# Altium PCB SAMV71_Xplained_Ultra.PcbDoc (part 7 of 9)
Units mm, origin at the board's own origin, x right, y up, seen from the top; angles counter-clockwise.
Board outline 90 x 135 mm, 8 copper layers (Top Layer LF-Signals, Ground Plane 1 (GND), Power Plane (VCC), Ground Plane 2 (GND), Signal Layer 1, Signal Layer 2, Ground Plane 3 (GND), Bottom Layer LF-Signals), stack 1.632 mm thick; 483 components, 411 nets, 1994 pads, 1021 vias.
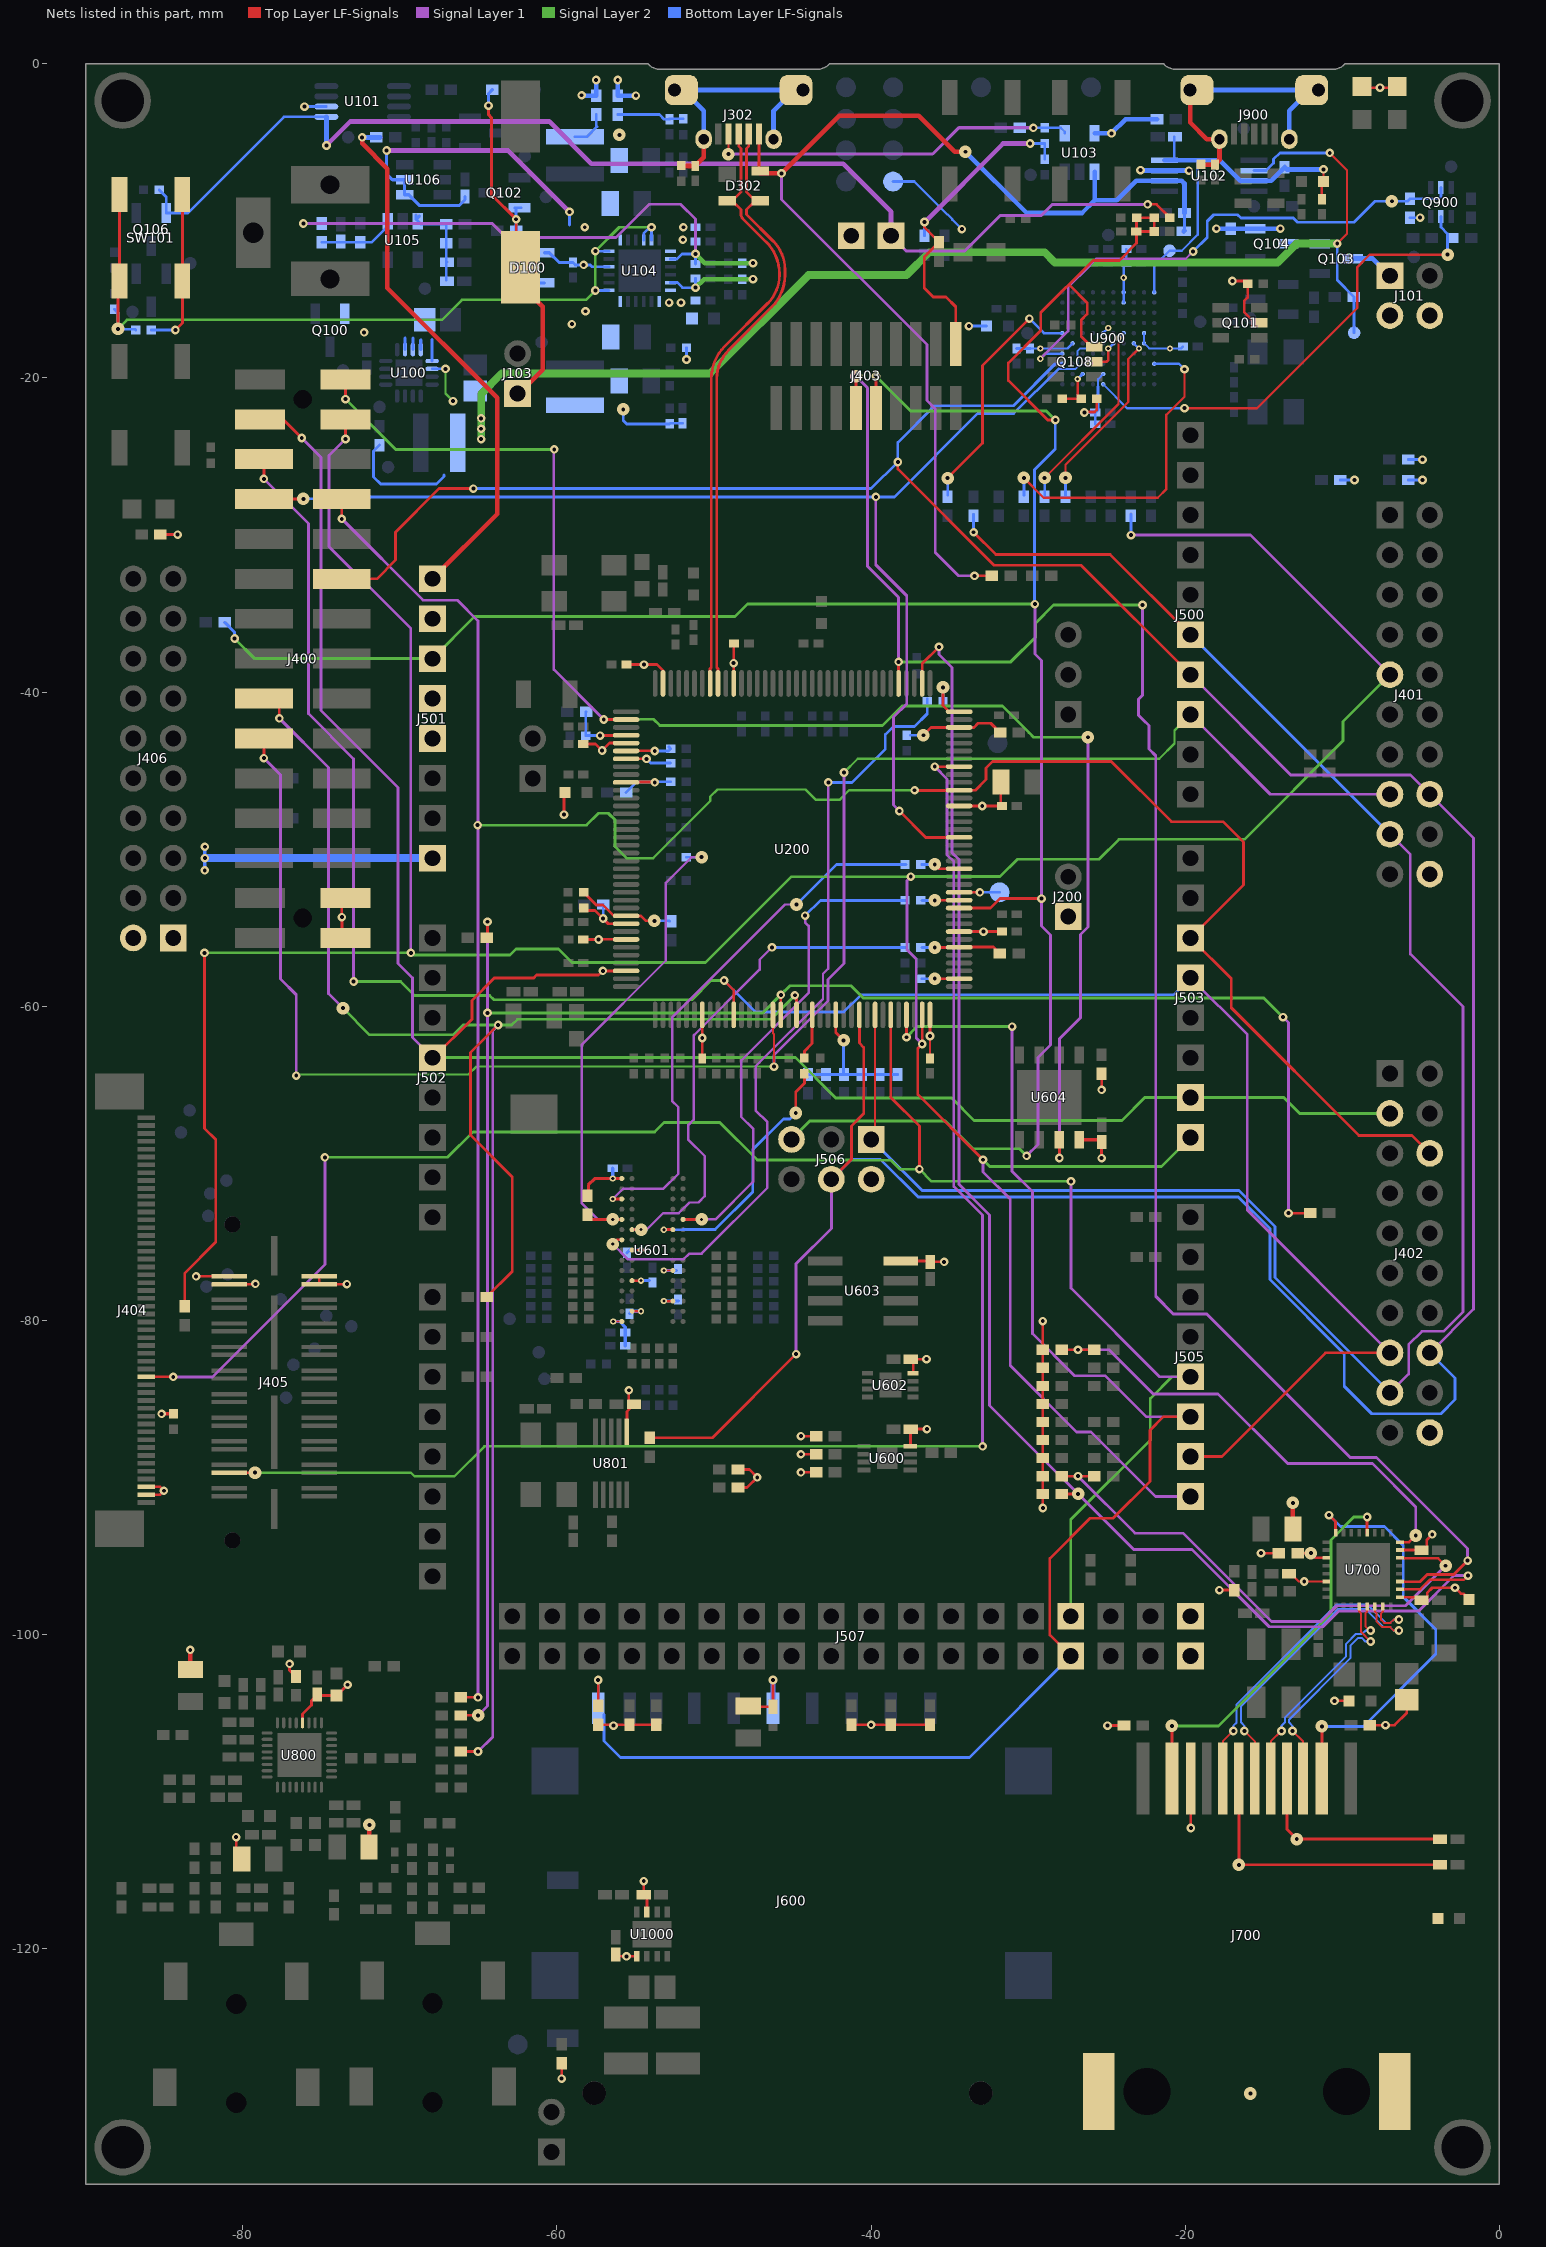
[diagram p12: the nets of this part, all layers, seen from the top]

## Via types
v1: diameter 0.55, hole 0.25, Top Layer LF-Signals to Bottom Layer LF-Signals, 546 vias
v2: diameter 0.55, hole 0.25, Top Layer LF-Signals to Bottom Layer LF-Signals, tented both sides, 190 vias
v3: diameter 0.55/0.55/0.55/0.8 (per signal layer), hole 0.25, Top Layer LF-Signals to Bottom Layer LF-Signals, tented top, 179 vias
v4: diameter 0.4, hole 0.2, Top Layer LF-Signals to Bottom Layer LF-Signals, 40 vias
v5: diameter 0.55, hole 0.25, Top Layer LF-Signals to Bottom Layer LF-Signals, tented top, 24 vias
v6: diameter 0.4, hole 0.2, Top Layer LF-Signals to Bottom Layer LF-Signals, tented both sides, 16 vias
v7: diameter 0.7, hole 0.35, Top Layer LF-Signals to Bottom Layer LF-Signals, 9 vias
v8: diameter 0.4/0.4/0.4/0.8 (per signal layer), hole 0.2, Top Layer LF-Signals to Bottom Layer LF-Signals, tented top, 6 vias
v9: diameter 0.4, hole 0.2, Top Layer LF-Signals to Bottom Layer LF-Signals, tented top, 5 vias
v10: diameter 0.66, hole 0.33, Top Layer LF-Signals to Bottom Layer LF-Signals, tented top, 4 vias
v11: diameter 0.55/0.55/0.55/0.8 (per signal layer), hole 0.25, Top Layer LF-Signals to Bottom Layer LF-Signals, 2 vias

## Nets (pads, with @x,y where several pads share a name; then routed paths per layer and width w, separated by ;. In a path a pad name is that pad's centre, name@x,y a point inside that pad or via, vN(x,y) a via of type N, cw(c..) or ccw(c..) an arc to the next point about the centre after c; other vN are vias at no path point) (continued)
PD08: J403.12 U200.113 U700.11 | length 117
  Top Layer LF-Signals w0.185: J403.12@-40.96,-21.91 v3(-40.96,-19.893) ; U200.113@-38.25,-39.45 v1(-38.25,-38.075) ; U700.11@-6.325,-96.625 -6.325,-96.642 -5.067,-96.642 -5.065,-96.64 -5.062,-96.64 -4.615,-96.193 -2.917,-96.193 v1(-2.025,-95.3)
  Signal Layer 1 w0.185: v3(-40.96,-19.893) -40.224,-20.63 -40.224,-31.994 -38.25,-33.968 v1(-38.25,-38.075) ; v1(-22.725,-34.461) -22.725,-40.208 -22.967,-40.45 -22.967,-41.061 -22.968,-41.489 -22.664,-41.793 -22.658,-41.793 -22.316,-42.135 -22.316,-43.619 -21.88,-44.055 -21.88,-78.47 -20.744,-79.606 -18.619,-79.606 -9.494,-88.731 -7.819,-88.731 -2.025,-94.525 v1(-2.025,-95.3)
  Signal Layer 2 w0.185: v1(-38.25,-38.075) -31.105,-38.075 -29.525,-36.495 -29.525,-35.594 -28.392,-34.461 v1(-22.725,-34.461)
PD09: R700.1 U200.110 U700.10 | length 95.8
  Top Layer LF-Signals w0.15: U700.10@-6.325,-97.125 -5.05,-97.125 -4.45,-96.525 -2.275,-96.525 v1(-2,-96.25)
  Top Layer LF-Signals w0.18: U200.110@-36.75,-39.45 -36.75,-38.2 v1(-35.675,-37.125) ; R700.1@-27.869,-91.048 v3(-26.825,-91.048)
  Signal Layer 1 w0.18: v1(-35.675,-37.125) -35.675,-37.604 -34.843,-38.436 -34.843,-50.228 -34.407,-50.663 -34.407,-71.338 -32.457,-73.288 -32.457,-85.415 -23.283,-94.59 -19.572,-94.59 -14.652,-99.51 -11.227,-99.51 -10.217,-98.5 -5.133,-98.5 -2.883,-96.25 v1(-2,-96.25)
PD10: J405.6 U200.101 | length 94.9
  Top Layer LF-Signals w0.175: J405.6@-80.87,-89.7 v3(-79.225,-89.7) ; v1(-35.95,-44.75) U200.101@-34.4,-44.75
  Signal Layer 1 w0.175: v1(-35.95,-44.75) -35.17,-45.53 -35.17,-50.363 -34.735,-50.798 -34.735,-71.473 -32.913,-73.296 -32.913,-88.012 v1(-32.9,-88.025)
  Signal Layer 2 w0.15: v3(-79.225,-89.7) -69.3,-89.7 -69.075,-89.925 -66.525,-89.925 -64.625,-88.025 v1(-32.9,-88.025)
PD11: J400.23 J402.6@-4.43,-69.37 J503.6@-19.67,-55.654 R200.1 U200.98 | length 168.9
  Top Layer LF-Signals w0.15: R200.1@-66.125,-104 v1(-65.025,-104)
  Top Layer LF-Signals w0.175: v1@-73.708,-28.967 J400.23@-73.708,-27.714 ; U200.98@-34.4,-46.25 -33.364,-46.25 -32.688,-45.573 -32.688,-44.838 -32.277,-44.427 -24.712,-44.427 -20.89,-48.25 -17.6,-48.25 -16.3,-49.55 -16.3,-52.284 J503.6@-19.67,-55.654 -17.075,-58.249 -17.075,-60.1 -8.95,-68.225 -5.575,-68.225 J402.6@-4.43,-69.37
  Top Layer LF-Signals w0.18: v1(-37.227,-46.252) -37.212,-46.267 -34.417,-46.267 U200.98@-34.4,-46.25
  Signal Layer 1 w0.18: v1(-73.705,-28.97) -68.525,-34.15 -66.35,-34.15 -65.035,-35.465 -65.035,-103.99 v1(-65.025,-104)
  Signal Layer 2 w0.15: -55.576,-50.57 -53.875,-50.57 -50.237,-46.932 -50.237,-46.654 -49.785,-46.202 -44.171,-46.202 -43.508,-46.865 -42.019,-46.865 -41.407,-46.252 v1(-37.227,-46.252) v1@-37.277,-46.202
  Signal Layer 2 w0.18: v1(-65.05,-48.475) -58.12,-48.475 -57.361,-47.716 -56.734,-47.716 -56.317,-48.133 -56.317,-49.829 -55.576,-50.57
PD12: J400.24 U200.92 U900.G5 | length 83.3
  Top Layer LF-Signals w0.175: J400.24@-78.661,-27.714 -76.164,-27.714 v3(-76.15,-27.7)
  Top Layer LF-Signals w0.18: v1(-38.2,-47.575) -36.525,-49.25 U200.92@-34.4,-49.25
  Signal Layer 1 w0.18: v1(-39.702,-27.576) -39.702,-31.898 -37.735,-33.865 -37.735,-40.757 -38.575,-41.597 -38.575,-47.2 v1(-38.2,-47.575)
  Bottom Layer LF-Signals w0.125: -27.972,-19.425 -26.975,-19.425 -26.85,-19.3 -26.85,-18.275 -26.7,-18.125 -26.2,-18.125 U900.G5@-25.875,-17.8
  Bottom Layer LF-Signals w0.15: -28.075,-19.425 -27.972,-19.425
  Bottom Layer LF-Signals w0.175: v3(-76.15,-27.7) -72.69,-27.7 -72.575,-27.585
  Bottom Layer LF-Signals w0.18: -72.575,-27.585 -39.725,-27.585 v1@-39.7,-27.61 ; v1(-39.702,-27.576) -38.519,-27.576 -33.218,-22.275 -30.925,-22.275 -28.075,-19.425
PD13: R261.1 U200.88 | length 2.5
  Top Layer LF-Signals w0.179: v3(-35.95,-50.975) -35.675,-51.25 U200.88@-34.4,-51.25
  Bottom Layer LF-Signals w0.179: R261.1@-36.775,-50.975 v3(-35.95,-50.975)
PD14: R264.1 U200.84 | length 2.4
  Top Layer LF-Signals w0.179: v3(-35.95,-53.265) -35.935,-53.25 U200.84@-34.4,-53.25
  Bottom Layer LF-Signals w0.179: R264.1@-36.771,-53.265 v3(-35.95,-53.265)
PD15: R210.1 R269.1 U200.106 | length 6.4
  Top Layer LF-Signals w0.179: v3@-36.675,-42.675 v3(-36.675,-42.75) -36.189,-42.265 -34.414,-42.265 U200.106@-34.4,-42.25 ; U200.106@-34.4,-42.265 U200.106@-34.4,-42.25 ; R210.1@-31.793,-42.578 -32.385,-41.985 -33.188,-41.985 -33.453,-42.25 U200.106@-34.4,-42.25
  Bottom Layer LF-Signals w0.179: R269.1@-37.5,-42.75 v3(-36.675,-42.75)
PD16: R234.1 R268.1 U200.78 | length 5.2
  Top Layer LF-Signals w0.179: v3(-35.95,-56.265) -34.4,-56.265 U200.78@-34.4,-56.25 ; U200.78@-34.4,-56.235 -32.213,-56.235 R234.1@-31.8,-56.649
  Bottom Layer LF-Signals w0.179: R268.1@-36.771,-56.266 -35.951,-56.266 v3(-35.95,-56.265)
PD17: R263.1 U200.74 | length 2.4
  Top Layer LF-Signals w0.179: v3(-35.95,-58.25) U200.74@-34.4,-58.25
  Bottom Layer LF-Signals w0.179: R263.1@-36.771,-58.251 -35.951,-58.251 v3(-35.95,-58.25)
PD18: J505.3@-19.67,-86.134 J507.8 J600.10 R611.1 U200.69 | length 100.1
  Top Layer LF-Signals w0.175: R611.1@-57.378,-104.52 v1(-57.378,-102.9) ; v1(-37.752,-61.978) v1(-37.752,-61.978) U200.69@-37.75,-60.55 ; J507.8@-27.29,-101.374 -28.625,-100.039 -28.625,-95.15 -26.075,-92.6 -24.6,-92.6 -22.25,-90.25 -22.25,-87 -21.384,-86.134 J505.3@-19.67,-86.134
  Signal Layer 1 w0.175: v1(-31.025,-61.3) -31.025,-70.508 -29.725,-71.808 -29.725,-80.848 -27.037,-83.535 -25.09,-83.535 -22.491,-86.134 J505.3@-19.67,-86.134
  Signal Layer 2 w0.175: v1(-37.752,-61.978) -37.074,-61.3 v1(-31.025,-61.3)
  Bottom Layer LF-Signals w0.175: J600.10@-57.378,-104.7 v1(-57.378,-102.9) ; J600.10@-57,-105.1 -57,-106.78 -55.955,-107.825 -33.741,-107.825 J507.8@-27.29,-101.374
PD19: J404.34 J505.4@-19.67,-83.594 J507.7 U200.67 | length 117.5
  Top Layer LF-Signals w0.15: J404.34@-86.15,-83.6 v1(-84.433,-83.6)
  Top Layer LF-Signals w0.175: U200.67@-38.75,-60.55 -38.75,-65.8 -36.925,-67.625 v1(-36.925,-70.375)
  Signal Layer 1 w0.175: v1(-84.433,-83.6) -81.925,-83.6 -74.775,-76.45 v1(-74.775,-69.619) ; v1(-27.276,-71.15) -27.275,-77.95 -21.631,-83.594 J505.4@-19.67,-83.594
  Signal Layer 2 w0.175: v1@-74.756,-69.619 -66.96,-69.619 -65.349,-68.008 -53.784,-68.008 -53.185,-67.409 -49.635,-67.409 -47.245,-69.8 ; -41.309,-69.8 -38.75,-69.8 -38.175,-70.375 v1(-36.925,-70.375) -36.15,-71.15 v1(-27.276,-71.15) ; J507.7@-27.29,-98.834 -27.29,-92.69 -22.225,-87.625 -22.225,-84.975 -20.844,-83.594 J505.4@-19.67,-83.594
  Signal Layer 2 w0.18: -47.245,-69.8 -41.309,-69.8
PD20: J401.17@-6.97,-49.05 J402.17@-6.97,-84.61 J500.5@-19.67,-36.35 J506.1@-39.99,-68.481 R915.2 U200.65 | length 125.5
  Top Layer LF-Signals w0.15: J506.1@-39.99,-68.481 -39.75,-68.241 U200.65@-39.75,-60.55
  Top Layer LF-Signals w0.175: v1(-33.475,-29.825) -32.062,-31.238 -24.782,-31.238 J500.5@-19.67,-36.35
  Signal Layer 1 w0.175: J402.17@-6.97,-84.61 -5.775,-83.415 -5.775,-81.55 -4.925,-80.7 -3.555,-80.7 -2.325,-79.47 -2.325,-60.025 -5.67,-56.68 -5.67,-50.35 J401.17@-6.97,-49.05
  Bottom Layer LF-Signals w0.175: J506.1@-39.99,-68.481 -36.744,-71.727 -16.585,-71.727 -14.288,-74.024 -14.288,-77.274 -6.97,-84.592 J402.17@-6.97,-84.61 ; v1(-33.475,-29.825) R915.2@-33.475,-28.675 ; J500.5@-19.67,-36.35 J401.17@-6.97,-49.05
PD21: J400.19 J401.16@-4.43,-46.51 J402.16@-4.43,-82.07 J500.4@-19.67,-38.89 J506.4@-42.53,-71.021 R230.1 U200.63 U900.K3 | length 223.2
  Top Layer LF-Signals w0.175: J400.19@-73.708,-32.794 -71.469,-32.794 -70.275,-31.6 -70.275,-29.825 -67.5,-27.05
  Top Layer LF-Signals w0.18: -67.5,-27.05 v1(-65.325,-27.05) ; R230.1@-54.1,-87.475 -50.1,-87.475 v1(-44.775,-82.15) ; J506.4@-42.53,-71.021 -41.25,-69.741 -41.25,-67.625 -40.475,-66.85 -40.475,-62.625 -40.75,-62.35 U200.63@-40.75,-60.55 ; v1(-38.3,-25.35) -38.3,-25.8 -32.175,-31.925 -26.635,-31.925 J500.4@-19.67,-38.89
  Signal Layer 1 w0.175: J500.4@-19.67,-38.89 -13.285,-45.275 -5.665,-45.275 J401.16@-4.43,-46.51 -1.65,-49.29 -1.65,-79.29 J402.16@-4.43,-82.07
  Signal Layer 1 w0.18: v1(-44.775,-82.15) -44.775,-76.4 -42.53,-74.155 J506.4@-42.53,-71.021
  Bottom Layer LF-Signals w0.15: -28.275,-19.1 U900.K3@-27.825,-19.1
  Bottom Layer LF-Signals w0.18: v1(-65.325,-27.05) -40,-27.05 v1(-38.3,-25.35) -38.3,-24.107 -35.963,-21.77 -30.945,-21.77 -28.275,-19.1 ; J506.4@-42.53,-71.021 -41.259,-69.75 -39.4,-69.75 -37,-72.15 -16.625,-72.15 -14.615,-74.16 -14.615,-77.41 -9.875,-82.15 -9.875,-84.2 -8.125,-85.95 -3.725,-85.95 -2.825,-85.05 -2.825,-83.675 J402.16@-4.43,-82.07
PD22: R204.1 R205.1 R206.2 R212.1 R214.2 R227.1 U200.60 | length 9.8
  Top Layer LF-Signals w0.175: U200.60@-42.262,-60.537 U200.60@-42.25,-60.55 -42.25,-61.68 v3(-41.752,-62.178)
  Bottom Layer LF-Signals w0.175: R214.2@-44.028,-64.349 R206.2@-41.728,-64.349 ; v3(-41.752,-62.178) -41.752,-64.326 R206.2@-41.728,-64.349 ; R204.1@-38.303,-64.349 R206.2@-41.728,-64.349
PD23: R265.1 U200.57 | length 3
  Top Layer LF-Signals w0.179: R265.1@-44.25,-63.3 -44.25,-62.867 -43.762,-62.379 -43.762,-60.562 U200.57@-43.75,-60.55
PD24: J400.14 R219.1 R223.1 U200.55 | length 122.2
  Top Layer LF-Signals w0.175: J400.14@-78.661,-40.414 -77.68,-40.414 v1(-77.68,-41.67) ; R223.1@-66.125,-107.45 v1(-65.025,-107.45) ; R219.1@-64.475,-78.519 -62.85,-76.894 -62.85,-70.868 -65.505,-68.213 -65.505,-62.955 v1(-63.75,-61.2) ; v1(-44.852,-59.303) -44.848,-59.303 -44.75,-59.205 U200.55@-44.75,-60.55
  Signal Layer 1 w0.175: v1(-77.68,-41.67) -74.55,-44.8 -74.55,-59.2 v3(-73.625,-60.125) ; v1(-65.025,-107.45) -64.09,-106.515 -64.09,-61.54 v1(-63.75,-61.2)
  Signal Layer 2 w0.175: v3(-73.625,-60.125) -71.929,-61.821 -66.604,-61.821 -65.983,-61.2 v1(-63.75,-61.2) -62.888,-61.2 -62.527,-60.839 -46.389,-60.839 v1(-44.852,-59.303) v1@-44.753,-59.203
PD25: J400.12 J401.15@-6.97,-46.51 J500.3@-19.67,-41.43 U200.52 | length 115.8
  Top Layer LF-Signals w0.15: U200.52@-46.25,-60.55 -46.25,-61.719 -46.18,-61.789 v1(-46.18,-63.85)
  Top Layer LF-Signals w0.18: v1@-78.661,-44.207 J400.12@-78.661,-42.954
  Signal Layer 1 w0.175: v1(-46.18,-63.85) -46.18,-63.105 -42.75,-59.675 -42.75,-58.298 -41.725,-57.273 v1(-41.725,-45.125)
  Signal Layer 1 w0.18: v1(-78.658,-44.21) -77.6,-45.268 -77.6,-58.275 -76.6,-59.275 v1(-76.6,-64.425) ; J500.3@-19.67,-41.43 -14.59,-46.51 J401.15@-6.97,-46.51
  Signal Layer 2 w0.15: v1(-76.6,-64.425) -76.524,-64.349 -65.645,-64.349 -65.132,-63.836 -46.194,-63.836 v1(-46.18,-63.85) ; v1(-41.725,-45.125) -40.85,-44.25 -21.652,-44.25 -20.685,-43.282 -20.685,-42.445 J500.3@-19.67,-41.43
PD26: R209.1 R215.1 R229.1 U200.53 | length 120.4
  Top Layer LF-Signals w0.15: R229.1@-66.125,-105.15 v3(-65.025,-105.15)
  Top Layer LF-Signals w0.175: v1(-13.425,-73.175) R209.1@-12.05,-73.175
  Top Layer LF-Signals w0.18: R215.1@-64.475,-55.644 R215.1@-64.4,-55.569 ; R215.1@-64.42,-55.569 v1(-64.42,-54.625) ; U200.53@-45.75,-60.55 v1(-45.75,-59.275)
  Signal Layer 1 w0.175: v1(-13.775,-60.7) -13.425,-61.05 v1(-13.425,-73.175)
  Signal Layer 1 w0.18: v3(-65.025,-105.15) -64.42,-104.545 v1(-64.42,-54.625)
  Signal Layer 2 w0.18: v1@-64.4,-60.425 -46.9,-60.425 v1(-45.75,-59.275) -45.175,-58.7 -41.275,-58.7 -40.5,-59.475 -15,-59.475 v1(-13.775,-60.7)
  other v1: -64.42,-60.425
PD27: J400.26 J402.15@-6.97,-82.07 J503.5@-19.67,-58.194 J505.2@-19.67,-88.674 U200.47 | length 138.6
  Top Layer LF-Signals w0.175: v1@-78.661,-26.427 J400.26@-78.661,-25.174 ; v1(-49.36,-58.365) -48.75,-58.975 U200.47@-48.75,-60.55 ; J505.2@-19.67,-88.674 -17.674,-88.674 -11.07,-82.07 J402.15@-6.97,-82.07
  Signal Layer 1 w0.175: v1(-78.658,-26.43) -75.825,-29.264 -75.825,-41.375 -72.95,-44.25 v1(-72.95,-58.425) ; J503.5@-19.67,-58.194 -16.05,-61.814 -16.05,-72.99 J402.15@-6.97,-82.07
  Signal Layer 2 w0.175: v1(-72.95,-58.425) -69.953,-58.425 -69.062,-59.315 -64.284,-59.315 -64.012,-59.588 -51.416,-59.588 -50.193,-58.365 v1(-49.36,-58.365)
  Bottom Layer LF-Signals w0.175: v1(-49.36,-58.365) -47.35,-60.375 -41.75,-60.375 -40.65,-59.275 -20.751,-59.275 J503.5@-19.67,-58.194
PD28: J400.27 J401.9@-6.97,-38.89 J503.1@-19.67,-68.354 J505.1@-19.67,-91.214 R203.2 R913.1 U200.71 | length 231.3
  Top Layer LF-Signals w0.15: v1@-36.75,-62.475 U200.71@-36.75,-60.55
  Top Layer LF-Signals w0.175: R203.2@-83.706,-79.1 -83.706,-77.006 -81.725,-75.025 -81.725,-68.487 -82.437,-67.775 v1(-82.437,-56.6) ; v1(-73.467,-23.887) J400.27@-73.467,-22.634 ; v1@-36.75,-62.475 -36.75,-62.405 v1(-36.752,-62.403) -37.025,-62.676 -37.025,-65.625 v1(-32.875,-69.775)
  Signal Layer 1 w0.175: v1(-73.467,-23.887) -74.51,-24.93 -74.51,-30.75 -69.303,-35.957 v1(-69.303,-56.603) ; v1(-37.477,-51.753) -37.72,-51.996 -37.72,-56.405 -37.125,-57 -37.125,-62.03 v1(-36.752,-62.403) ; v1(-32.875,-69.775) -32.875,-70.549 -31.14,-72.284 -31.14,-82.883 -26.912,-87.11 -26.006,-87.11 -21.903,-91.214 J505.1@-19.67,-91.214
  Signal Layer 1 w0.18: v1@-23.503,-30.005 -15.855,-30.005 J401.9@-6.97,-38.89
  Signal Layer 2 w0.175: v1@-82.428,-56.603 v1(-69.303,-56.603) ; -57.674,-57.225 -50.553,-57.225 -45.081,-51.753 v1(-37.477,-51.753) -37.462,-51.737 -31.787,-51.737 -30.693,-50.643 -25.48,-50.643 -24.212,-49.375 -16.225,-49.375 -9.95,-43.1 -9.95,-41.87 J401.9@-6.97,-38.89 ; v1(-32.875,-69.775) -32.45,-70.2 -21.516,-70.2 J503.1@-19.67,-68.354
  Signal Layer 2 w0.18: v1(-69.303,-56.603) -69.162,-56.744 -62.99,-56.744 -62.599,-56.353 -59.914,-56.353 -59.042,-57.225 -57.674,-57.225
  Bottom Layer LF-Signals w0.18: v1(-23.459,-30.014) R913.1@-23.459,-28.668
PD29: R270.1 U200.108 | length 3.1
  Top Layer LF-Signals w0.179: v3@-35.431,-39.702 -35.429,-39.7 v3(-35.425,-39.7) -35.425,-40.838 -35.431,-40.844 -35,-41.275 -34.975,-41.25 U200.108@-34.4,-41.25
  Bottom Layer LF-Signals w0.179: R270.1@-35.429,-40.435 -35.425,-40.431 v3(-35.425,-39.7)
PD30: J400.28 J402.3@-6.97,-66.83 J502.4@-67.93,-63.274 J503.2@-19.67,-65.814 U200.34 | length 125.1
  Top Layer LF-Signals w0.175: J400.28@-78.903,-22.634 -77.441,-22.634 v1(-76.25,-23.825)
  Top Layer LF-Signals w0.18: J502.4@-67.897,-63.307 -65.418,-60.828 -65.418,-59.628 -63.99,-58.2 -61.481,-58.2 -61.304,-58.023 -57.347,-58.023 v1(-57.078,-57.753) -57.075,-57.75 U200.34@-55.6,-57.75
  Signal Layer 1 w0.18: v1(-76.25,-23.825) -75.025,-25.05 -75.025,-41.175 -70.125,-46.075 -70.125,-57.275 -69.206,-58.194 -69.206,-61.998 J502.4@-67.93,-63.274
  Signal Layer 2 w0.18: J502.4@-67.93,-63.274 -44.821,-63.274 -42.25,-65.845 -34.868,-65.845 -33.444,-67.269 -24.037,-67.269 -22.582,-65.814 J503.2@-19.67,-65.814 -13.732,-65.814 -12.716,-66.83 J402.3@-6.97,-66.83 J402.3@-7.044,-66.904
PD31: J400.29 U200.2 U604.7 | length 96.9
  Top Layer LF-Signals w0.175: v1(-73.467,-21.347) J400.29@-73.467,-20.094 ; v1(-57.025,-41.75) U200.2@-55.6,-41.75
  Top Layer LF-Signals w0.18: v1(-28.015,-69.663) U604.7@-28.015,-68.5
  Signal Layer 1 w0.175: v1(-60.175,-24.55) -60.2,-24.525 -60.2,-38.575 v1(-57.025,-41.75)
  Signal Layer 1 w0.18: v1(-28.015,-69.663) -28.015,-62.072 -26.675,-60.732 -26.675,-55.435 -26.2,-54.96 v3(-26.2,-42.875)
  Signal Layer 2 w0.175: v1(-73.467,-21.347) -70.264,-24.55 v1(-60.175,-24.55) ; v1(-57.025,-41.75) -57.012,-41.737 -53.838,-41.737 -53.452,-42.123 -39.273,-42.123 -38.039,-40.889 -31.649,-40.889 -29.954,-42.583
  Signal Layer 2 w0.18: -29.954,-42.583 -29.662,-42.875 v3(-26.2,-42.875)
PE00: R216.1 R243.1 U200.4 | length 4.1
  Top Layer LF-Signals w0.179: v1(-57.25,-42.775) U200.4@-55.625,-42.775
  Bottom Layer LF-Signals w0.179: R216.1@-58.15,-41.25 -58.17,-41.27 R243.1@-58.17,-42.775 v1(-57.25,-42.775)
PE01: R244.1 U200.6 | length 3.1
  Top Layer LF-Signals w0.179: U200.6@-55.6,-43.75 -55.6,-43.736 -53.789,-43.736 v1(-53.775,-43.75)
  Bottom Layer LF-Signals w0.179: v1(-53.775,-43.75) -52.906,-43.75 R244.1@-52.762,-43.606 R244.1@-52.884,-43.484
PE02: R245.1 U200.7 | length 2.9
  Top Layer LF-Signals w0.179: U200.7@-55.6,-44.25 v1(-54.3,-44.25)
  Bottom Layer LF-Signals w0.179: v1(-54.3,-44.25) -54.028,-44.522 R245.1@-52.767,-44.522
PE03: R217.1 R246.1 U200.10 | length 5
  Top Layer LF-Signals w0.179: U200.10@-55.6,-45.75 -55.6,-45.736 -53.789,-45.736 v1(-53.775,-45.75)
  Bottom Layer LF-Signals w0.179: R217.1@-55.603,-46.394 -54.944,-45.736 -53.789,-45.736 v1(-53.775,-45.75) -53.73,-45.705 R246.1@-52.767,-45.705
PE04: R218.1 R247.1 U200.27 | length 6.2
  Top Layer LF-Signals w0.179: R247.1@-58.3,-52.75 -57.496,-53.554 -57.065,-53.554 -56.368,-54.25 U200.27@-55.6,-54.25 -54.659,-54.25 -54.344,-54.565 v3(-53.796,-54.565)
  Bottom Layer LF-Signals w0.179: v3(-53.796,-54.565) -52.856,-54.565 R218.1@-52.833,-54.588
PE05: R222.1 R248.1 U200.28 | length 4
  Top Layer LF-Signals w0.179: R248.1@-58.3,-53.75 -58.141,-53.909 -57.576,-53.909 -56.735,-54.75 U200.28@-55.6,-54.75
  Bottom Layer LF-Signals w0.179: v1@-57.065,-54.42 v1(-57.06,-54.416) R222.1@-57.06,-53.525
PHY_AD0: R710.1 R717.1 U700.14 | length 33.9
  Top Layer LF-Signals w0.15: U700.14@-6.325,-95.125 -6.325,-95.15 -3.905,-95.15 -3.43,-95.625 v3(-3.425,-95.625)
  Top Layer LF-Signals w0.18: R710.1@-27.869,-89.923 R717.1@-25.794,-89.923
  Signal Layer 1 w0.18: v1(-26.825,-89.923) -23.198,-93.55 -20.145,-93.55 -14.515,-99.18 -11.363,-99.18 -10.353,-98.17 -5.97,-98.17 v3(-3.425,-95.625)
PHY_AD1: R709.1 R716.1 U700.16 | length 30.7
  Top Layer LF-Signals w0.175: U700.16@-6.325,-94.125 -5.75,-94.125 v3(-5.325,-93.7)
  Top Layer LF-Signals w0.18: R709.1@-27.869,-81.873 v1(-26.825,-81.873) R716.1@-25.794,-81.873
  Signal Layer 1 w0.15: v3@-5.33,-93.695 v3(-5.325,-93.7)
  Signal Layer 1 w0.18: v1(-26.825,-81.873) -24.852,-81.873 -22.041,-84.684 -17.916,-84.684 -13.475,-89.125 -8.075,-89.125 -5.325,-91.875 v3(-5.325,-93.7)
PHY_CONFIG1: R712.1 U700.27 | length 1.9
  Top Layer LF-Signals w0.15: R712.1@-12.85,-94.825 v3(-12,-94.825) -11.7,-95.125 U700.27@-11.025,-95.125
PHY_LED0: J700.2 U700.24 | length 27.3
  Top Layer LF-Signals w0.18: J700.2@-11.305,-109.175 v3(-11.305,-105.85) ; v1(-10.85,-92.4) -10.85,-92.375 -10.425,-92.8 U700.24@-10.425,-93.525
  Bottom Layer LF-Signals w0.18: v3@-11.35,-105.975 v3@-11.225,-105.85 ; v3(-11.305,-105.85) v3@-11.225,-105.85 ; v1(-10.85,-92.4) -10.125,-93.125 -7.325,-93.125 -6.125,-94.325 -6.125,-97.6 -4.05,-99.675 -4.05,-101.25 -8.65,-105.85 v3@-11.225,-105.85
PHY_LED1: J700.11 U700.20 | length 25
  Top Layer LF-Signals w0.18: v3(-20.85,-105.825) -20.85,-109.17 J700.11@-20.845,-109.175 ; U700.20@-8.425,-93.525 v1(-8.425,-92.525)
  Signal Layer 2 w0.18: v3(-20.85,-105.825) -17.875,-105.825 -10.725,-98.675 -10.725,-93.975 -9.275,-92.525 v1(-8.425,-92.525)
POWER_LED_CTRL: Q900.2 R906.1 U900.K4 | length 34.5
  Signal Layer 1 w0.15: -26.075,-12.825 -25.667,-12.417 -19.967,-12.417 v1(-19.501,-11.951)
  Signal Layer 1 w0.175: v4(-29.225,-18.775) -27.457,-17.007 -27.457,-14.208 -26.075,-12.825
  Bottom Layer LF-Signals w0.15: v4(-29.225,-18.775) -28.9,-18.45 U900.K4@-27.825,-18.45 ; v3(-6.85,-8.75) R906.1@-5.85,-8.75
  Bottom Layer LF-Signals w0.175: v1(-19.501,-11.951) -18.6,-11.05 -18.6,-10.025 -18.188,-9.613 -16.662,-9.613 -16.45,-9.825 -13.125,-9.825 -12.862,-10.088 -9.255,-10.088 -7.918,-8.75 v3(-6.85,-8.75) ; R906.1@-5.85,-8.75 R906.1@-5.7,-8.6 -3.875,-8.6 -3.725,-8.45 Q900.2@-3.725,-7.875
PSU_ENABLE: R125.1 R129.2 SW101.1 SW101.2 U104.7 U104.12 U104.16 U104.17 | length 53
  Top Layer LF-Signals w0.175: v3@-87.875,-16.9 -87.9,-16.875 v3(-87.95,-16.875) -87.95,-13.925 SW101.1@-87.85,-13.825 SW101.2@-87.85,-8.325
  Signal Layer 2 w0.175: v3(-87.95,-16.875) -87.375,-16.3 -67.325,-16.3 -66.053,-15.028 -58.158,-15.028 v1(-57.559,-14.43) v1(-57.559,-11.93) -56.034,-10.405 v1(-53.982,-10.405)
  Bottom Layer LF-Signals w0.175: R129.2@-88.175,-15.625 -87.95,-15.85 v3(-87.95,-16.875) -87.925,-16.9 -86.875,-16.9 R125.1@-86.825,-16.95 ; v1(-57.559,-14.43) U104.7@-56.682,-14.43 ; v1(-57.559,-11.93) U104.12@-56.682,-11.93 ; U104.16@-54.482,-11.23 -54.482,-10.805 -54.082,-10.405 v1(-53.982,-10.405) U104.17@-53.982,-11.23
RAS: R268.2 U601.K6 | length 32.6
  Top Layer LF-Signals w0.179: U601.K6@-55.222,-74.225 v8(-54.647,-74.225) ; v1(-46.311,-56.25) v1@-46.296,-56.265
  Signal Layer 1 w0.155: v8(-54.647,-74.225) -54.287,-74.225 -53.242,-73.18 -52.256,-73.18 -51.574,-72.497 -50.998,-72.497 -50.595,-72.094 -50.595,-69.547 -51.633,-68.509 -51.633,-67.56 -51.3,-67.228 -51.3,-61.877 -51.253,-61.829 -51.253,-61.817 -47.101,-57.666 -47.101,-57.041 v1(-46.311,-56.25)
  Bottom Layer LF-Signals w0.179: v1(-46.311,-56.25) -46.295,-56.266 R268.2@-37.771,-56.266
RCT: C706.1 J700.7 | length 18.2
  Top Layer LF-Signals w0.175: J700.7@-16.585,-109.175 v3(-16.585,-114.665) C706.1@-3.9,-114.665
RJ45_GND: J700.10 J700.13 J700.14 L702.2 | length 3.1
  Top Layer LF-Signals w0.175: v1(-19.645,-112.32) J700.10@-19.645,-109.175
  other v3: -15.85,-129.225
RX_N: J700.8 U700.7 | length 20.8
  Top Layer LF-Signals w0.127: J700.8@-17.605,-109.175 -17.605,-106.812 v1(-16.935,-106.142) ; U700.7@-7.425,-98.225 -7.425,-98.538 -7.537,-98.65 -7.537,-99.068 -7.343,-99.261 -6.936,-99.261 -6.725,-99.05 v1(-6.4,-99.05)
  Bottom Layer LF-Signals w0.127: v1(-16.935,-106.142) -16.935,-105.817 -16.723,-105.605 -16.723,-104.454 -10.361,-98.091 -8.414,-98.091 -7.244,-99.261 -6.936,-99.261 -6.725,-99.05 v1(-6.4,-99.05)
RX_P: J700.6 U700.6 | length 20.8
  Top Layer LF-Signals w0.127: v1(-16.235,-106.142) -15.565,-106.812 J700.6@-15.565,-109.175 ; U700.6@-7.925,-98.225 -7.925,-98.538 -7.814,-98.65 -7.814,-99.183 -7.458,-99.538 -6.936,-99.538 -6.725,-99.75 v1(-6.4,-99.75)
  Bottom Layer LF-Signals w0.127: v1(-16.235,-106.142) -16.235,-105.817 -16.447,-105.605 -16.446,-104.569 -10.246,-98.368 -8.529,-98.368 -7.359,-99.538 -6.936,-99.538 -6.725,-99.75 v1(-6.4,-99.75)
SDA10: R261.2 U601.N7 | length 34.5
  Top Layer LF-Signals w0.179: v4(-56.447,-72.275) U601.N7@-55.872,-72.275
  Signal Layer 1 w0.155: v4(-56.447,-72.275) -55.794,-71.623 -53.848,-71.623 -53.838,-71.633 -53.242,-71.633 -52.282,-70.673 -52.282,-66.423 -52.674,-66.031 -52.674,-60.717 -45.482,-53.525 v3(-44.75,-53.525)
  Bottom Layer LF-Signals w0.179: v3(-44.75,-53.525) -42.2,-50.975 R261.2@-37.843,-50.975 R261.2@-37.775,-50.975
SDCK: R265.2 U601.K2 | length 18.4
  Top Layer LF-Signals w0.179: v4@-53.193,-74.225 U601.K2@-52.622,-74.225 ; v3(-44.8,-66.8) -44.8,-65.456 -44.25,-64.906 R265.2@-44.25,-64.3
  Bottom Layer LF-Signals w0.179: v4(-53.197,-74.229) -49.936,-74.229 -49.932,-74.225 ; -51.982,-74.225 -49.932,-74.225 ; v3(-44.8,-66.8) -45.172,-67.172 -45.587,-67.172 -47.539,-69.124 -47.539,-71.832 -49.932,-74.225
SDCKE: R264.2 U601.L1 | length 31.4
  Top Layer LF-Signals w0.179: U601.L1@-51.972,-73.575 v8(-50.794,-73.575)
  Signal Layer 1 w0.155: v8(-50.794,-73.575) -49.916,-73.575 -47.518,-71.177 -47.518,-67.796 -48.268,-67.046 -48.268,-63.446 -43.98,-59.158 -43.98,-54.889 -44.202,-54.667 v1(-44.202,-54.234)
  Bottom Layer LF-Signals w0.179: v1(-44.202,-54.234) -43.233,-53.265 R264.2@-37.843,-53.265 R264.2@-37.771,-53.265
SDCS: R266.2 R604.2 U601.L7 | length 31.4
  Top Layer LF-Signals w0.179: R604.2@-57.996,-73.258 -57.996,-73.575 v8(-56.447,-73.575) U601.L7@-55.872,-73.575
  Signal Layer 1 w0.155: v8(-56.447,-73.575) -57.385,-73.575 -58.429,-72.531 -58.429,-62.464 -53.075,-57.11 -53.075,-52.147 -51.441,-50.513 v11(-50.794,-50.513)
  Bottom Layer LF-Signals w0.179: R266.2@-51.767,-50.513 v11(-50.794,-50.513)
SDWE: R270.2 U601.J7 | length 50.4
  Top Layer LF-Signals w0.179: v8(-56.45,-75.15) -56.175,-74.875 U601.J7@-55.872,-74.875
  Signal Layer 1 w0.155: v8(-56.45,-75.15) -55.5,-76.1 -51.927,-76.1 -51.574,-75.747 -50.794,-75.747 -46.603,-71.556 -46.603,-67.383 -47.353,-66.633 -47.353,-63.825 -43.065,-59.537 -43.065,-57.937 -42.734,-57.606 v1@-42.734,-45.75
  Bottom Layer LF-Signals w0.179: v1(-42.725,-45.75) -41.22,-45.75 -39.096,-43.626 -39.096,-42.71 -38.571,-42.184 -37.234,-42.184 -36.429,-41.379 R270.2@-36.429,-40.435
SHIELD: C903.2 J900.6@-11.512,-1.675 J900.7@-19.687,-1.675 J900.8@-13.375,-4.8 J900.9@-17.825,-4.8 R919.2 | length 18.9
  Top Layer LF-Signals w0.3: J900.7@-19.687,-1.675 -19.687,-3.738 -18.625,-4.8 J900.9@-17.825,-4.8 -17.825,-6.15 C903.2@-18.1,-6.425 -18.975,-6.425 R919.2@-19,-6.4
  Bottom Layer LF-Signals w0.3: J900.7@-19.687,-1.675 J900.6@-12.05,-1.675 ; J900.8@-13.375,-4.8 -13.375,-3 J900.6@-12.05,-1.675 ; J900.6@-11.512,-1.675 J900.6@-12.05,-1.675
STATUS_LED_CTRL: Q900.5 R909.2 U900.F1 | length 30.7
  Top Layer LF-Signals w0.15: v1(-20.05,-21.925) -15.435,-21.925 -9.041,-15.531 -9.041,-12.941 -8.25,-12.15 v3(-3.3,-12.15)
  Bottom Layer LF-Signals w0.15: U900.F1@-25.225,-20.4 -23.7,-21.925 v1(-20.05,-21.925)
  Bottom Layer LF-Signals w0.175: Q900.5@-3.725,-9.725 -3.725,-10.4 -3.3,-10.825 v3(-3.3,-12.15)
SWCLK: R904.1 U900.D6 | length 12.4
  Top Layer LF-Signals w0.15: v3(-28.95,-26.368) -28.95,-26.361 -24.25,-21.661 v6(-24.25,-17.475)
  Bottom Layer LF-Signals w0.175: R904.1@-28.95,-27.468 v3(-28.95,-26.368) ; v6(-24.25,-17.475) U900.D6@-23.925,-17.15
SWDIO: R905.1 U900.C5 | length 11.7
  Top Layer LF-Signals w0.15: v3(-27.625,-26.368) -27.625,-25.525 -23.625,-21.525 -23.625,-18.8 v6(-22.95,-18.125)
  Bottom Layer LF-Signals w0.15: U900.C5@-23.275,-17.8 v6(-22.95,-18.125)
  Bottom Layer LF-Signals w0.175: R905.1@-27.625,-27.468 v3(-27.625,-26.368)
TARGET_CHIP_ERASE: R900.1 U900.K6 | length 15.9
  Top Layer LF-Signals w0.175: v3(-35.125,-26.375) -32.902,-24.152 -32.902,-19.202 v1(-29.925,-16.225)
  Bottom Layer LF-Signals w0.175: R900.1@-35.125,-27.475 v3(-35.125,-26.375) ; v1(-29.925,-16.225) -29,-17.15 U900.K6@-27.825,-17.15
TARGET_RESET: C104.1 J403.10 J501.3@-67.93,-37.874 J506.5@-45.07,-68.481 Q108.3 R106.1 R107.2 R110.2 R402.2 U200.83 | length 166
  Top Layer LF-Signals w0.175: v1(-28.275,-22.675) -28.756,-22.675 -31.262,-20.169 -31.262,-19.042 -29.2,-16.979 -29.2,-15.845 -25.873,-12.518 -24.195,-12.518 -23.1,-11.422 ; -27.383,-14.075 -26.243,-15.215 -26.243,-15.935 -26.622,-16.313 -26.622,-17.371 -25.974,-18.018 Q108.3@-25.807,-18.018
  Top Layer LF-Signals w0.18: U200.83@-34.4,-53.75 -32.393,-53.75 -31.793,-53.15 v1(-29.15,-53.15) ; -23.1,-11.422 C104.1@-23.1,-10.65 ; C104.1@-23.1,-10.65 -23.075,-10.675 R107.2@-21.975,-10.675 R106.1@-21.975,-9.8 R110.2@-23.1,-9.8 C104.1@-23.1,-10.65
  Top Layer LF-Signals w0.185: J403.10@-39.69,-21.91 v1(-39.69,-19.893)
  Signal Layer 1 w0.18: v1(-30.1,-69.525) -29.375,-68.8 -29.375,-63.265 -28.575,-62.465 -28.575,-55.475 -29.15,-54.9 v1(-29.15,-53.15) -29.15,-38 -29.575,-37.575 v1(-29.575,-34.4)
  Signal Layer 2 w0.18: J506.5@-45.07,-68.481 -43.904,-67.315 -35.285,-67.315 -33.525,-69.075 -30.55,-69.075 v1(-30.1,-69.525)
  Signal Layer 2 w0.185: v1(-80.525,-36.587) -79.238,-37.874 J501.3@-67.93,-37.874 -65.248,-35.193 -48.668,-35.193 -47.875,-34.4 v1(-29.575,-34.4) ; v1(-39.69,-19.893) -37.483,-22.1 -28.85,-22.1 v1(-28.275,-22.675)
  Bottom Layer LF-Signals w0.18: v1(-29.575,-34.4) -29.59,-34.385 -29.59,-25.85 -28.275,-24.535 v1(-28.275,-22.675)
  Bottom Layer LF-Signals w0.185: R402.2@-81.159,-35.56 -80.525,-36.194 v1(-80.525,-36.587)
TARGET_RESET_SENSE: R139.1 R141.1 U900.H2 | length 3
  Top Layer LF-Signals w0.175: R139.1@-27.827,-21.324 R141.1@-26.632,-21.324 -26.85,-21.106 v6(-26.85,-20.075)
  Bottom Layer LF-Signals w0.175: v6(-26.85,-20.075) U900.H2@-26.525,-19.75
TARGET_USB_ID: J302.4 R121.1 R307.1 U103.4 | length 24.2
  Top Layer LF-Signals w0.15: v3(-49.084,-5.747) J302.4@-49.084,-4.475
  Signal Layer 1 w0.2: v3(-49.084,-5.747) -36.082,-5.747 -34.41,-4.075 v1(-29.675,-4.075)
  Bottom Layer LF-Signals w0.15: R307.1@-30.275,-4.075 R121.1@-28.95,-4.075 -27.935,-4.075 -27.678,-4.332 U103.4@-27.678,-4.425
TARGET_USB_N: D302.3 J302.2 U200.136 | length 38.2
  Top Layer LF-Signals w0.175: -49.823,-38.437 -49.823,-20.036 cw(c-47.283,-20.036) -49.08,-18.239 -46.334,-15.494 ccw(c-48.376,-13.452) -45.488,-13.452 -45.488,-13.092 ccw(c-48.028,-13.092) -46.232,-11.296 -47.935,-9.593 -47.935,-9.286 D302.3@-47.465,-8.816 ; U200.136@-49.75,-39.45 U200.136@-49.75,-38.616 ; J302.2@-47.784,-4.475 -47.784,-5.238 -47.935,-5.389 -47.935,-8.17 -47.465,-8.641 -47.146,-8.641 D302.3@-47.059,-8.728
  Top Layer LF-Signals w0.18: -49.823,-38.437 -49.75,-38.51 U200.136@-49.75,-38.616
TARGET_USB_P: D302.2 J302.3 U200.137 | length 38.7
  Top Layer LF-Signals w0.175: U200.137@-50.25,-39.45 -50.25,-38.616 cw(c-49.999,-38.616) -50.176,-38.439 -50.176,-38.436 -50.176,-20.041 cw(c-47.288,-20.041) -49.331,-17.998 -46.58,-15.248 ccw(c-48.376,-13.452) -45.836,-13.452 -45.836,-13.381 ccw(c-48.724,-13.381) -46.682,-11.338 -48.181,-9.839 cw(c-47.935,-9.593) -48.283,-9.593 -48.283,-9.286 D302.2@-48.753,-8.816 ; D302.2@-48.873,-8.898 ccw(c-49.071,-9.096) -49.071,-8.816 D302.2@-49.159,-8.728 -49.071,-8.641 D302.2@-48.794,-8.641 ; D302.2@-48.753,-8.641 -48.283,-8.17 -48.283,-5.389 -48.434,-5.238 J302.3@-48.434,-4.475
  Top Layer LF-Signals w0.18: U200.137@-50.25,-38.616 -50.25,-38.51 -50.176,-38.436
TARGET_USB_SHIELD: C304.2 J302.6@-44.347,-1.675 J302.7@-52.522,-1.675 J302.8@-46.209,-4.8 J302.9@-50.659,-4.8 R304.2 | length 18.5
  Top Layer LF-Signals w0.3: R304.2@-52.1,-6.478 -52.075,-6.503 C304.2@-51.2,-6.503 -50.659,-5.962 J302.9@-50.659,-4.8
  Bottom Layer LF-Signals w0.3: J302.7@-52.522,-1.675 J302.6@-44.347,-1.675 ; J302.7@-52.042,-1.617 -50.659,-3 J302.9@-50.659,-4.8 ; J302.8@-46.209,-4.8 -46.209,-3 J302.6@-44.826,-1.617
TCT: C705.1 J700.4 | length 12.9
  Top Layer LF-Signals w0.175: J700.4@-13.525,-109.175 -13.525,-112.4 v3(-12.9,-113.025) C705.1@-4.075,-113.025
TRACESWO: R921.1 U900.A3 | length 21.1
  Top Layer LF-Signals w0.15: v3(-30.275,-26.368) -29.018,-27.625 -21.75,-27.625 -21.2,-27.075 -21.2,-22.347 -20.05,-21.197 v1(-20.05,-19.45)
  Bottom Layer LF-Signals w0.15: U900.A3@-21.975,-19.1 -20.4,-19.1 v1(-20.05,-19.45)
  Bottom Layer LF-Signals w0.175: R921.1@-30.275,-27.468 v3(-30.275,-26.368)
TST: TP200.1 U200.85 | length 2.6
  Top Layer LF-Signals w0.175: U200.85@-34.4,-52.75 v1(-33.075,-52.75)
  Bottom Layer LF-Signals w0.175: v1(-33.075,-52.75) TP200.1@-31.825,-52.75
TX_N: J700.5 U700.5 | length 14.2
  Top Layer LF-Signals w0.127: J700.5@-14.545,-109.175 -14.545,-106.812 v1(-13.875,-106.142) ; U700.5@-8.425,-98.225 -8.425,-98.538 -8.537,-98.65 -8.537,-99.475 -8.262,-99.75 v1(-8.2,-99.75)
  Bottom Layer LF-Signals w0.127: v1(-13.875,-106.142) -13.875,-105.817 -13.664,-105.605 -13.664,-105.298 -9.762,-101.396 -9.762,-100.594 -9.13,-99.961 -8.736,-99.961 -8.525,-99.75 v1(-8.2,-99.75)
TX_P: J700.3 U700.4 | length 14.5
  Top Layer LF-Signals w0.127: v1(-13.175,-106.142) -12.505,-106.812 J700.3@-12.505,-109.175 ; U700.4@-8.925,-98.225 -8.925,-98.538 -8.814,-98.65 -8.814,-99.836 v1(-8.2,-100.45)
  Bottom Layer LF-Signals w0.127: v1(-13.175,-106.142) -13.175,-105.817 -13.387,-105.605 -13.387,-105.412 -9.485,-101.511 -9.485,-100.708 -9.015,-100.238 -8.736,-100.238 -8.525,-100.45 v1(-8.2,-100.45)
V+: C125.2 R135.2 R136.1 U105.1 | length 5
  Bottom Layer LF-Signals w0.175: R136.1@-74.983,-11.369 -71.821,-11.369 -70.771,-10.319 U105.1@-70.771,-10.013
V-: C123.1 C124.2 R105.1 R111.2 U105.3 | length 6.1
  Bottom Layer LF-Signals w0.175: U105.3@-68.865,-10.013 -68.662,-10.217 R105.1@-67.058,-10.217 ; C123.1@-67.058,-12.571 C123.1@-67.008,-12.621 ; C124.2@-67.056,-13.784 R105.1@-67.056,-10.216
  Bottom Layer LF-Signals w0.18: U105.3@-68.967,-9.9 U105.3@-68.967,-9.617
  Bottom Layer LF-Signals w0.2: U105.3@-68.967,-9.9 U105.3@-68.767,-9.7
V_SUPERCAP: C103.1 D100.2 J103.1@-62.51,-20.987 Q102.2 R104.2 R108.2 | length 26.3
  Top Layer LF-Signals w0.175: C103.1@-62.666,-11.559 -62.6,-11.494 v1(-62.6,-9.9)
  Top Layer LF-Signals w0.2: v1(-64.356,-2.665) -64.356,-3.25 -64.179,-3.427 -64.179,-8.321 v1(-62.6,-9.9)
  Top Layer LF-Signals w0.3: J103.1@-62.51,-20.987 -62.414,-20.987 -60.904,-19.477 -60.904,-15.459 -62.325,-14.037 C103.1@-62.325,-12.95
  Bottom Layer LF-Signals w0.18: Q102.2@-62.298,-9.168 Q102.2@-62.398,-9.168 -62.685,-9.168 -62.6,-9.254 v1(-62.6,-9.9) R104.2@-62.6,-10.625 -62.6,-11.579 -61.798,-12.381 -61.798,-13.306 -61.148,-13.956 D100.2@-60.798,-13.956
  Bottom Layer LF-Signals w0.2: v1(-64.356,-2.665) -64.356,-1.889 R108.2@-64.118,-1.65
VBAT: J501.1@-67.93,-32.794 R112.1 | length 34.5
  Top Layer LF-Signals w0.3: v1(-72.402,-4.687) -72.402,-5.073 -70.8,-6.675 -70.8,-14.275 -63.8,-21.275 -63.8,-28.664 J501.1@-67.93,-32.794
  Bottom Layer LF-Signals w0.3: v1(-72.402,-4.687) -71.262,-4.687 R112.1@-71.25,-4.675
VCC_BACKUP_P3V3: J102.2 Q106.2 R106.2 R127.2 U101.1 | length 76.5
  Top Layer LF-Signals w0.175: v1(-22.4,-8.95) -21.825,-8.95 R106.2@-20.975,-9.8
  Signal Layer 1 w0.2: J102.2@-38.73,-10.95 -37.75,-11.93 -34.055,-11.93 -31.786,-9.662 -29.162,-9.662 -28.45,-8.95 v1(-22.4,-8.95)
  Signal Layer 1 w0.3: v1(-74.675,-5.2) -73.146,-3.671 -60.504,-3.671 -57.811,-6.364 -41.786,-6.364 -38.73,-9.42 J102.2@-38.73,-10.95
  Bottom Layer LF-Signals w0.175: R127.2@-85.325,-8.025 -84.875,-8.475 Q106.2@-84.875,-9.5 -83.5,-9.5 -77.375,-3.375 U101.1@-74.687,-3.375 ; v1@-74.687,-5.2 -74.687,-5.213 -74.675,-5.225 v1(-74.675,-5.2)
  Bottom Layer LF-Signals w0.3: U101.1@-74.687,-3.375 -74.675,-3.387 v1(-74.675,-5.2)
VCC_EDBG_P3V3: C909.1 C910.1 C911.1 C912.1 C913.1 C914.1 C915.1 D900.2 D901.2 L901.1 Q101.2 Q108.2 R141.2 R143.2 R901.2 R902.2 R903.2 R906.2 R920.1 TP907.1 U900.B5 U900.B6 U900.D9 U900.D10 U900.E5 U900.F2 U900.F6 U900.J5 | length 37.5
  Top Layer LF-Signals w0.175: v2(-26.425,-22.2) -26.462,-22.162 -25.77,-22.162 -25.632,-22.024 R141.2@-25.632,-21.324 ; Q108.2@-25.807,-18.968 -25.018,-18.968 -24.9,-18.85 v6(-24.9,-18.125) ; v1(-17,-13.825) -16.993,-13.832 R143.2@-16.032,-13.832 ; R143.2@-16.025,-14 -16.025,-14.879 -16.252,-15.106 -16.252,-15.813 -15.57,-16.495 Q101.2@-15.287,-16.495 ; D900.2@-8.756,-1.518 v5(-7.6,-1.518) D901.2@-6.47,-1.518
  Bottom Layer LF-Signals w0.125: -27.972,-18.125 -27.5,-18.125 ; -25.55,-20.565 -25.55,-20.075 U900.F2@-25.225,-19.75 ; U900.B6@-22.625,-17.15 U900.B5@-22.625,-17.8 -22.3,-18.125 -21.828,-18.125
  Bottom Layer LF-Signals w0.15: -37.25,-7.5 -35.15,-9.6 -35.118,-9.6 -34.825,-9.893 -34.825,-9.925 v1(-34.225,-10.525) ; C913.1@-29.875,-18.125 v9(-29.225,-18.125) -27.972,-18.125 ; -27.5,-18.125 U900.J5@-27.175,-17.8 ; U900.D9@-23.925,-15.2 U900.D10@-23.925,-14.55 v4(-23.925,-13.625) -23.925,-12.875 C910.1@-23.75,-12.7 ; -21.828,-18.125 v9(-20.975,-18.125) -20.275,-18.125 C911.1@-20.15,-18
  Bottom Layer LF-Signals w0.175: TP907.1@-38.6,-7.5 -37.25,-7.5 ; v2(-33.775,-16.7) L901.1@-32.65,-16.7 ; C914.1@-30.75,-18.125 C913.1@-29.875,-18.125 ; v2(-26.425,-22.2) C912.1@-25.725,-22.2 ; C915.1@-25.725,-22.95 C912.1@-25.725,-22.2 ; -25.55,-20.565 -25.55,-22.025 C912.1@-25.725,-22.2 ; U900.F6@-25.225,-17.15 v6(-24.9,-16.825) ; v6(-24.9,-18.125) U900.E5@-24.575,-17.8 ; C910.1@-23.75,-12.7 C909.1@-23.75,-11.8 ; R901.2@-10.125,-26.5 v5(-9.225,-26.5) ; R903.2@-5.8,-26.5 v5(-4.9,-26.5) ; R902.2@-5.8,-25.2 v5(-4.9,-25.2) ; R906.2@-5.7,-9.8 v5(-5.05,-9.8)
  Bottom Layer LF-Signals w0.3: v1(-56.132,-1.03) R920.1@-56.132,-2.03 v1(-54.982,-2.03)
VCC_EDBG_USB_P5V0: C105.1 C908.1 L900.2 pad.3@-21,-11.9 R116.2 U102.3 U102.8 U900.A10 | length 24.5
  Top Layer LF-Signals w0.15: C908.1@-11.3,-8.625 -11.3,-7.6 L900.2@-11.2,-7.5 v5@-11.2,-6.775
  Bottom Layer LF-Signals w0.15: U900.A10@-21.975,-14.55 -21.975,-12.875 pad.3@-21,-11.9 -20.225,-11.9 -19.2,-10.875 -19.2,-6.15
  Bottom Layer LF-Signals w0.175: U102.8@-20.7,-6.15 C105.1@-20.7,-4.65
  Bottom Layer LF-Signals w0.3: U102.8@-21.325,-6.15 -20.7,-6.15 -19.2,-6.15 -17.8,-6.15 -16.5,-7.45 U102.3@-15.625,-7.45 -14.525,-7.45 R116.2@-13.675,-6.6 ; R116.2@-13.675,-6.575 -13.525,-6.725 v5(-11.2,-6.725)
VCC_EXT_P5V0: J101.1@-6.97,-13.49 Q103.3 | length 3
  Signal Layer 2 w0.3: J101.1@-6.97,-13.49 J101.1@-6.97,-13.35
  Bottom Layer LF-Signals w0.3: Q103.3@-9.35,-12.4 -8.068,-12.4 J101.1@-6.978,-13.49
VCC_EXT_P5V0_P14V0: C101.1 J405.40 J501.8@-67.93,-50.574 Q100.2 U100.10 U100.11 U100.12 U100.13 | length 21.6
  Top Layer LF-Signals w0.175: v5(-82.975,-77.2) J405.40@-80.87,-77.2
  Bottom Layer LF-Signals w0.2: v1(-82.425,-51.35) -82.425,-50.577 v1(-82.422,-50.574) v1(-82.422,-49.848) ; U100.10@-69.675,-18.2 -69.675,-17.45 ; U100.11@-69.175,-18.2 -69.175,-17.473 ; -68.685,-17.575 -68.675,-17.585 U100.12@-68.675,-18.2 ; U100.13@-67.95,-18.925 -67.95,-17.57
  Bottom Layer LF-Signals w0.5: v1(-82.422,-50.574) J501.8@-67.93,-50.574
  other v1: -72.275,-17.1
VCC_IN_P5V0: C100.1 L100.2 pad.3@-9.25,-17.125 Q103.2 Q104.3 R101.1 R115.2 U100.14 U102.2 | length 93.4
  Top Layer LF-Signals w0.15: v5(-10.8,-5.675) -9.7,-6.775 -9.7,-10.825 v5@-10.3,-11.425 ; v5@-10.475,-11.425 v5@-10.3,-11.425 ; v5(-10.325,-11.45) v5@-10.3,-11.425
  Signal Layer 2 w0.15: v1(-67.1,-19.425) -67.1,-21 v1(-66.625,-21.475)
  Signal Layer 2 w0.5: v1(-64.825,-23.9) v1(-64.825,-23.237) v1(-64.825,-22.575) -64.825,-21.025 -63.508,-19.708 -50.239,-19.708 -43.98,-13.45 -37.75,-13.45 -36.3,-12 -28.95,-12 -28.3,-12.65 -14.12,-12.65 -12.92,-11.45 v5(-10.325,-11.45)
  Bottom Layer LF-Signals w0.15: U100.14@-67.95,-19.425 v1(-67.1,-19.425)
  Bottom Layer LF-Signals w0.175: U102.2@-15.625,-6.8 -14.85,-6.8 -14.375,-6.325 -14.375,-6.075 -13.975,-5.675 v5(-10.8,-5.675) ; v5(-10.325,-11.45) -10.325,-13.775 -9.25,-14.85 pad.3@-9.25,-17.125
  Bottom Layer LF-Signals w0.18: R101.1@-71.3,-24.275 -71.675,-24.65 -71.675,-26.3 -71.225,-26.75 -67.675,-26.75 -67.2,-26.275 -67.2,-26.19
  Bottom Layer LF-Signals w0.3: Q104.3@-13.45,-11.45 Q103.2@-11.45,-11.45 v5(-10.325,-11.45)
VCC_MCU_P3V3: C200.1 C201.1 C202.1 C203.1 C204.1 C205.1 C206.1 C207.1 C216.1 J102.1 L200.1 U200.5 U200.30 U200.43 U200.72 U200.80 U200.96 U200.134 U200.143 | length 25.1
  Top Layer LF-Signals w0.15: C203.1@-36.25,-63.25 v1(-36.25,-61.9)
  Top Layer LF-Signals w0.18: v1(-59.55,-47.8) L200.1@-59.55,-46.4 ; C201.1@-58.25,-55.75 v1(-57.35,-55.75) -57.335,-55.735 -55.6,-55.735 U200.30@-55.6,-55.75 ; C200.1@-58.25,-43.3 -57.551,-43.3 v1(-57.128,-43.723) -56.656,-43.25 U200.5@-55.6,-43.25 ; C207.1@-55.5,-38.25 v1(-54.456,-38.25) -53.625,-38.25 -53.25,-38.625 U200.143@-53.25,-39.45 ; C202.1@-50.75,-63.25 v1(-50.75,-62.025) U200.43@-50.75,-60.55 ; U200.134@-48.75,-39.45 v1(-48.75,-38.162) C206.1@-48.75,-36.875 ; v1(-36.25,-61.9) U200.72@-36.25,-60.55 ; U200.80@-34.4,-55.25 v1(-32.85,-55.25) C204.1@-31.75,-55.25 ; U200.96@-34.4,-47.25 v1(-32.925,-47.25) -31.75,-47.25 C216.1@-31.75,-45.75
VCC_P1V2: C120.1 C710.1 C711.1 C712.1 L701.1 R132.2 U104.23 U700.9 U700.30 | length 16.6
  Top Layer LF-Signals w0.15: C711.1@-13.4,-96.125 -13.275,-96.125 -12.775,-96.625 v1(-12.425,-96.625) U700.30@-11.025,-96.625
  Top Layer LF-Signals w0.175: U700.9@-6.325,-97.625 -5.15,-97.625 C710.1@-4.95,-97.825 -4.662,-97.825 -4.6,-97.887 -4.6,-97.35 -4.275,-97.025 v1(-2.825,-97.025) -2.45,-97.4 -2.3,-97.4 L701.1@-1.925,-97.775
  Top Layer LF-Signals w0.3: C712.1@-13.15,-93.275 v3(-13.15,-91.625)
  Signal Layer 2 w0.3: v1(-51.182,-14.255) -50.638,-13.711 v1(-47.519,-13.711)
  Bottom Layer LF-Signals w0.175: U104.23@-52.782,-13.93 -52.332,-13.93 -52.007,-14.255 v1(-51.182,-14.255) C120.1@-51.182,-13.661 ; R132.2@-48.207,-13.711 v1(-47.519,-13.711)
VCC_P1V8: C119.1 L805.1 L806.1 R128.2 R136.2 R819.1 U104.20 | length 40.6
  Top Layer LF-Signals w0.175: v1(-77.025,-101.875) -77.025,-102.275 R819.1@-76.625,-102.675
  Top Layer LF-Signals w0.3: v1(-83.35,-100.975) -83.35,-102.209 L806.1@-83.325,-102.234 ; L805.1@-71.959,-113.525 -71.959,-112.134 v3(-71.95,-112.125)
  Signal Layer 1 w0.175: v1(-76.15,-10.169) -64.12,-10.169 -63.231,-11.058 -56.239,-11.058 -54.131,-8.95 -52.121,-8.95 -51.182,-9.889 v1(-51.182,-12.105)
  Signal Layer 2 w0.3: v1(-51.182,-12.105) -50.594,-12.692 v1(-47.519,-12.692)
  Bottom Layer LF-Signals w0.175: v1(-76.15,-10.169) R136.2@-74.983,-10.169 ; U104.20@-52.782,-12.43 -52.357,-12.43 -52.032,-12.105 v1(-51.182,-12.105) C119.1@-51.182,-12.742 ; R128.2@-48.207,-12.692 v1(-47.519,-12.692)
VCC_P2V0: C114.1 C115.1 L101.2 R122.2 | length 4.5
  Bottom Layer LF-Signals w0.175: v3(-55.782,-22.005) -55.782,-22.705 -55.557,-22.93 R122.2@-52.832,-22.93 ; R122.2@-52.782,-22.88 C114.1@-52.007,-22.88
VCC_P3V3: C116.1 C117.1 L102.2 R100.1 R124.2 R920.2 | length 6.8
  Bottom Layer LF-Signals w0.175: L102.2@-58.857,-4.645 -58.097,-4.645 -57.457,-4.005 -57.507,-3.955 R100.1@-57.507,-3.23 ; R920.2@-56.132,-3.23 -53.482,-3.23 -53.182,-3.53 C116.1@-52.832,-3.53 ; C116.1@-52.832,-3.505 R124.2@-51.957,-3.505
  other v3: -56.032,-4.53
VCC_P5V0: C107.1 C108.1 C109.1 C110.1 C111.1 C112.1 C113.1 C121.1 C1002.1 D100.1 J101.3@-6.97,-16.03 J501.5@-67.93,-42.954 J506.2@-39.99,-71.021 J507.1 J507.2 Q104.2 R113.2 R114.2 R125.2 SW101.3 SW101.4 U102.7 U103.5 U104.1 U104.6 U104.10 U104.13 U104.19 U104.24 U106.4 U106.5 U1000.3 | length 50.7
  Top Layer LF-Signals w0.175: v1(-84.3,-16.95) -83.85,-16.5 SW101.3@-83.85,-13.825 SW101.4@-83.85,-8.325
  Top Layer LF-Signals w0.18: v1(-54.475,-115.705) C1002.1@-54.475,-116.58 -54.275,-116.78 U1000.3@-54.275,-117.668
  Signal Layer 1 w0.3: v1(-70.85,-5.525) -63.112,-5.525 v1(-59.207,-9.43)
  Bottom Layer LF-Signals w0.175: R125.2@-85.825,-16.95 v1(-84.3,-16.95) ; C108.1@-58.982,-12.655 -58.832,-12.805 v1(-58.307,-12.805) -57.882,-12.805 -57.757,-12.93 U104.10@-56.682,-12.93
  Bottom Layer LF-Signals w0.2: v1(-70.85,-5.525) -70.85,-7.02 -70.483,-7.387 U106.5@-69.699,-7.387 U106.4@-69.699,-8.337 -69.435,-8.337 -68.741,-9.03 -66.241,-9.03 -65.857,-8.646 C121.1@-65.857,-8.459 ; D100.1@-60.798,-12.031 -60.488,-12.031 -59.864,-12.655 C108.1@-58.982,-12.655 ; -59.207,-10.255 v1(-59.207,-9.43)
  Bottom Layer LF-Signals w0.3: U103.5@-25.772,-4.425 v1(-24.7,-4.425) -23.8,-3.525 R113.2@-21.8,-3.525 ; v1(-22.85,-6.775) -22.825,-6.8 U102.7@-21.325,-6.8 v1(-19.775,-6.8) ; v1(-18.025,-10.5) R114.2@-17.1,-10.5 Q104.2@-15.55,-10.5 v1(-13.95,-10.5)
  other v1: -59.057,-16.58 -58.182,-15.755 -52.857,-15.205 -52.107,-15.205 -51.982,-11.205 -58.232,-10.405 -51.957,-10.405
VCC_TARGET_P3V3: C600.1 C601.1 C602.1 C603.1 C604.1 C605.1 C606.1 C607.1 C608.1 C609.1 C610.1 C611.1 C612.1 C613.1 C702.1 C703.1 C818.1 C819.1 C822.1 C1003.1 J101.4@-4.43,-16.03 J200.1@-27.442,-54.295 J400.1@-73.467,-55.654 J400.3 J401.20@-4.43,-51.59 J402.20@-4.43,-87.15 J403.1 J404.48 J404.49 J405.37 J405.38 J405.39 J406.1@-84.44,-55.654 J406.2@-86.98,-55.654 J501.2@-67.93,-35.334 J501.4@-67.93,-40.414 J600.4 L700.1 L804.1 R100.2 R102.2 R120.1 R121.2 R134.2 R231.1 R232.1 R302.2 R303.2 R404.1 R600.2 R601.2 R602.2 R604.1 R605.1 R606.2 R607.2 R608.2 R609.2 R610.2 R611.2 R612.2 R700.2 R701.2 R702.2 R703.1 R705.2 R706.2 R707.2 R708.2 R709.2 R710.2 R711.2 R712.2 R713.2 U101.2 U600.8 U601.A7 U601.B6 U601.C2 U601.E6 U601.F2 U601.H6 U601.R7 U602.8 U603.8 U604.8 U700.15 U800.4 U801.1 U1000.5 | length 113.3
  Top Layer LF-Signals w0.15: v4(-56.422,-80.075) U601.A7@-55.872,-80.075 ; U601.B6@-55.222,-79.425 v4(-54.647,-79.425) ; U601.E6@-55.222,-77.475 v4(-54.647,-77.475) ; U601.H6@-55.222,-75.525 v4(-54.647,-75.525) ; v4(-53.197,-78.775) U601.C2@-52.622,-78.775 ; v4(-53.197,-76.825) U601.F2@-52.622,-76.825
  Top Layer LF-Signals w0.175: J404.49@-86.15,-91.1 -85.275,-91.1 v1(-85.025,-90.85) -85.275,-90.6 J404.48@-86.15,-90.6 ; R302.2@-85.25,-29.969 -84.156,-29.969 v1(-84.15,-29.975) ; J405.38@-80.87,-77.7 -79.225,-77.7 v1(-79.2,-77.675) ; v1(-80.425,-112.9) -80.425,-113.941 L804.1@-80.066,-114.3 ; U800.4@-76.2,-105.625 -76.2,-105.075 -75.625,-104.5 -75.625,-104.208 C818.1@-75.25,-103.833 C818.1@-75.25,-103.881 ; C818.1@-75.273,-103.881 C818.1@-75.25,-103.881 ; C818.1@-75.25,-104.125 C818.1@-75.25,-103.881 ; J405.39@-75.13,-77.2 J405.37@-75.13,-77.7 v1(-73.375,-77.7) ; v1@-73.697,-54.328 J400.3@-73.697,-53.075 ; v1(-73.694,-54.331) -73.694,-55.427 J400.1@-73.467,-55.654 ; v1(-73.325,-103.2) -74.006,-103.881 C819.1@-74.025,-103.881 C818.1@-75.25,-103.881 ; v1(-59.7,-128.275) R612.2@-59.7,-127.3 ; -57.005,-105.75 R609.2@-55.378,-105.75 R610.2@-53.678,-105.75 ; C1003.1@-56.25,-120.38 -56.138,-120.492 v1(-55.575,-120.492) U1000.5@-54.925,-120.492 ; U801.1@-55.55,-87.1 -55.55,-85.8 C822.1@-55.1,-85.35 -55.425,-85.35 v1(-55.425,-84.45) ; R232.1@-48.475,-90.65 -47.9,-90.65 v1(-47.25,-90) -47.75,-89.5 R231.1@-48.475,-89.5 ; C612.1@-47.823,-104.55 -47.773,-104.6 C613.1@-46.248,-104.6 v1(-46.248,-102.9) ; v1(-44.475,-89.675) R600.2@-43.5,-89.675 ; v1(-44.475,-88.525) R601.2@-43.5,-88.525 ; v1(-44.475,-87.375) R602.2@-43.5,-87.375 ; R606.2@-41.253,-105.75 R607.2@-38.753,-105.75 R608.2@-36.253,-105.75 ; U603.8@-38.125,-76.22 -36.28,-76.22 C602.1@-36.225,-76.275 v1(-35.35,-76.275) ; U600.8@-37.5,-88.025 C600.1@-37.5,-86.95 ; C600.1@-37.475,-86.925 v1(-36.45,-86.925) ; U602.8@-37.325,-83.375 -37.325,-82.625 C601.1@-37.475,-82.475 v1(-36.475,-82.475) ; v1(-36.6,-10.075) -36.6,-10.425 R303.2@-35.675,-11.35 ; v1(-29.075,-80.05) -29.069,-80.056 R709.2@-29.069,-81.873 R708.2@-29.069,-83.023 R707.2@-29.069,-86.473 R706.2@-29.069,-87.623 R713.2@-29.069,-88.773 R710.2@-29.069,-89.923 R700.2@-29.069,-91.048 v1(-29.069,-91.944) ; v1(-25.325,-65.325) R605.1@-25.325,-64.3 ; v1(-24.95,-105.8) R703.1@-23.9,-105.8 ; v1(-17.825,-97.175) R702.2@-16.875,-97.175 ; v1(-15.175,-94.825) R712.2@-14.05,-94.825 ; v1(-10.5,-104.225) L700.1@-9.575,-104.225 ; R701.2@-8.25,-105.775 v1(-7.25,-105.775) -6.675,-105.775 -5.9,-105 C703.1@-5.9,-104.15 ; U700.15@-6.325,-94.625 C702.1@-4.95,-94.625 -4.75,-94.625 -4.625,-94.5 -4.625,-93.975 v1(-4.275,-93.625)
  Top Layer LF-Signals w0.18: R303.2@-35.675,-11.35 -36.616,-12.291 -36.616,-14.275 -36.048,-14.843 -35.233,-14.843 -34.61,-15.466 J403.1@-34.61,-17.84
  Top Layer LF-Signals w0.2: v1@-85.15,-85.95 -84.418,-85.95 R404.1@-84.414,-85.946 ; R604.1@-58,-72.075 -58,-71.375 -57.6,-70.975 v4(-56.447,-70.975) U601.R7@-55.872,-70.975 ; U604.8@-26.745,-68.5 C611.1@-25.475,-68.5 ; v1(-25.325,-69.675) C611.1@-25.325,-68.65
  Top Layer LF-Signals w0.3: C611.1@-25.475,-68.5 C611.1@-25.325,-68.65
  Signal Layer 1 w0.3: v1(-36.6,-10.075) -31.6,-5.075 v1(-29.875,-5.075)
  Bottom Layer LF-Signals w0.175: v1(-76.075,-2.725) U101.2@-74.687,-2.725 ; v1(-51.757,-18.83) R134.2@-51.757,-18.08 ; R102.2@-36.6,-10.95 v1(-36.6,-10.075) ; v1(-29.875,-5.075) R121.2@-28.95,-5.075 R120.1@-28.95,-6.075
  Bottom Layer LF-Signals w0.2: C605.1@-56.457,-70.321 -56.447,-70.331 v4(-56.447,-70.975) ; v4(-56.422,-80.075) -56.011,-80.075 -55.655,-80.431 C603.1@-55.655,-80.773 C604.1@-55.655,-81.623 ; C606.1@-55.547,-75.7 -55.372,-75.525 v4(-54.647,-75.525) ; C607.1@-55.378,-79.575 -55.227,-79.425 v4(-54.647,-79.425) ; v4(-54.647,-77.475) C609.1@-54.113,-77.475 ; v4(-53.197,-78.775) -52.258,-78.775 C608.1@-52.256,-78.777 ; v4(-53.197,-76.825) C610.1@-52.384,-76.825
  Bottom Layer LF-Signals w0.3: v1(-58.432,-2.005) -58.407,-2.03 R100.2@-57.507,-2.03 v1(-57.507,-1.03) ; J600.4@-46.248,-104.7 v1(-46.248,-102.9)
  other v1: -56.4,-105.8 -40.003,-105.75 -85.175,-85.95
VCC_TARGET_USB_P5V0: C106.1 D302.4 J302.1 R117.2 R305.2 U102.6 U103.1 | length 71.9
  Top Layer LF-Signals w0.175: J302.1@-47.134,-4.475 -47.134,-6.903 D302.4@-47.059,-6.978
  Top Layer LF-Signals w0.18: v1@-33.425,-32.594 v1(-33.419,-32.6) R305.2@-32.315,-32.6
  Top Layer LF-Signals w0.3: D302.4@-47.059,-6.978 v1(-45.703,-6.978) -42.025,-3.3 -36.975,-3.3 -34.675,-5.6 v3(-34,-5.6)
  Signal Layer 1 w0.18: v1(-45.703,-6.978) -45.703,-8.631 -36.452,-17.882 -36.452,-21.439 -35.918,-21.972 -35.918,-31.106 -34.425,-32.6 v1(-33.419,-32.6)
  Bottom Layer LF-Signals w0.175: C106.1@-20.05,-10.625 R117.2@-20.05,-9.5
  Bottom Layer LF-Signals w0.3: v3(-34,-5.6) -30.1,-9.5 -26.575,-9.5 -25.772,-8.697 ; U103.1@-25.772,-6.875 -25.772,-8.697 ; C106.1@-20.1,-10.675 C106.1@-20.05,-10.625 ; R117.2@-20.05,-9.5 -20.05,-7.625 -20.225,-7.45 U102.6@-21.325,-7.45 -23.125,-7.45 -24.372,-8.697 -25.772,-8.697